# EAGLE board CT_schematic (EAGLE 7.6.0)

Size 100 x 80 mm. Coordinates in mm from the lower left corner, seen from the top.
Outline: 0,0 100,0 100,80 0,80 0,0
Copper layers (1*16): Top 0.035mm / dielectric 1.5mm / Bottom 0.035mm
Design rules "default": minimum track width 10mil, minimum drill 24mil, track to track 8mil, track to pad 8mil, pad to pad 8mil, via to via 8mil, smd to smd 8mil, copper to edge 40mil, drill to drill 8mil, minimum pad ring 10mil, minimum via ring 8mil, stop-mask expansion 4mil, vias tented up to drill 0mil, thermal gap 10mil

## Footprints (pad centres in the part's own frame; a part is rotated, then mirrored left to right if it is on the bottom)
C0603 = smd 0.8 x 0.8: 1 -0.762,0; 2 0.762,0
C0402 = smd 0.5 x 0.5: 1 -0.508,0; 2 0.508,0
C0805 = smd 1.2 x 1.3: 1 -1.016,0; 2 1.016,0
R0603 = smd 0.8 x 0.8: 1 -0.762,0; 2 0.762,0
C1210 = smd 1.2 x 2.5: 1 -1.524,0; 2 1.524,0
C1206 = smd 1.3 x 1.6: 1 -1.524,0; 2 1.524,0
EXV-9H = smd 3.505 x 1.676: 1 -2.857,0; 2 2.857,0
L0603 = smd 0.8 x 0.8: 1 -0.762,0; 2 0.762,0
PJ-037B_PACKAGE = drill 3.7 square: 1 12,0 | drill 3.2 square: 2 6,0
UFBGA176_25 = smd 0.3 x 0.3: A1 -4.55,4.55; A2 -3.9,4.55; A3 -3.25,4.55; A4 -2.6,4.55; A5 -1.95,4.55; A6 -1.3,4.55; A7 -0.65,4.55; A8 0,4.55; A9 0.65,4.55; A10 1.3,4.55; A11 1.95,4.55; A12 2.6,4.55; A13 3.25,4.55; A14 3.9,4.55; A15 4.55,4.55; B1 -4.55,3.9; B2 -3.9,3.9; B3 -3.25,3.9; B4 -2.6,3.9; B5 -1.95,3.9; B6 -1.3,3.9; B7 -0.65,3.9; B8 0,3.9; B9 0.65,3.9; B10 1.3,3.9; B11 1.95,3.9; B12 2.6,3.9; B13 3.25,3.9; B14 3.9,3.9; B15 4.55,3.9; C1 -4.55,3.25; C2 -3.9,3.25; C3 -3.25,3.25; C4 -2.6,3.25; C5 -1.95,3.25; C6 -1.3,3.25; C7 -0.65,3.25; C8 0,3.25; C9 0.65,3.25; C10 1.3,3.25; C11 1.95,3.25; C12 2.6,3.25; C13 3.25,3.25; C14 3.9,3.25; C15 4.55,3.25; D1 -4.55,2.6; D2 -3.9,2.6; D3 -3.25,2.6; D4 -2.6,2.6; D5 -1.95,2.6; D6 -1.3,2.6; D7 -0.65,2.6; D8 0,2.6; D9 0.65,2.6; D10 1.3,2.6; D11 1.95,2.6; D12 2.6,2.6; D13 3.25,2.6; D14 3.9,2.6; D15 4.55,2.6; E1 -4.55,1.95; E2 -3.9,1.95; E3 -3.25,1.95; E4 -2.6,1.95; E12 2.6,1.95; E13 3.25,1.95; E14 3.9,1.95; E15 4.55,1.95; F1 -4.55,1.3; F2 -3.9,1.3; F3 -3.25,1.3; F4 -2.6,1.3; F6 -1.3,1.3; F7 -0.65,1.3; F8 0,1.3; F9 0.65,1.3; F10 1.3,1.3; F12 2.6,1.3; F13 3.25,1.3; F14 3.9,1.3; F15 4.55,1.3; G1 -4.55,0.65; G2 -3.9,0.65; G3 -3.25,0.65; G4 -2.6,0.65; G6 -1.3,0.65; G7 -0.65,0.65; G8 0,0.65; G9 0.65,0.65; G10 1.3,0.65; G12 2.6,0.65; G13 3.25,0.65; G14 3.9,0.65; G15 4.55,0.65; H1 -4.55,0; H2 -3.9,0; H3 -3.25,0; H4 -2.6,0; H6 -1.3,0; H7 -0.65,0; H8 0,0; H9 0.65,0; H10 1.3,0; H12 2.6,0; H13 3.25,0; H14 3.9,0; H15 4.55,0; J1 -4.55,-0.65; J2 -3.9,-0.65; J3 -3.25,-0.65; J4 -2.6,-0.65; J6 -1.3,-0.65; J7 -0.65,-0.65; J8 0,-0.65; J9 0.65,-0.65; J10 1.3,-0.65; J12 2.6,-0.65; J13 3.25,-0.65; J14 3.9,-0.65; J15 4.55,-0.65; K1 -4.55,-1.3; K2 -3.9,-1.3; K3 -3.25,-1.3; K4 -2.6,-1.3; K6 -1.3,-1.3; K7 -0.65,-1.3; K8 0,-1.3; K9 0.65,-1.3; K10 1.3,-1.3; K12 2.6,-1.3; K13 3.25,-1.3; K14 3.9,-1.3; K15 4.55,-1.3; L1 -4.55,-1.95; L2 -3.9,-1.95; L3 -3.25,-1.95; L4 -2.6,-1.95; L12 2.6,-1.95; L13 3.25,-1.95; L14 3.9,-1.95; L15 4.55,-1.95; M1 -4.55,-2.6; M2 -3.9,-2.6; M3 -3.25,-2.6; M4 -2.6,-2.6; M5 -1.95,-2.6; M6 -1.3,-2.6; M7 -0.65,-2.6; M8 0,-2.6; M9 0.65,-2.6; M10 1.3,-2.6; M11 1.95,-2.6; M12 2.6,-2.6; M13 3.25,-2.6; M14 3.9,-2.6; M15 4.55,-2.6; N1 -4.55,-3.25; N2 -3.9,-3.25; N3 -3.25,-3.25; N4 -2.6,-3.25; N5 -1.95,-3.25; N6 -1.3,-3.25; N7 -0.65,-3.25; N8 0,-3.25; N9 0.65,-3.25; N10 1.3,-3.25; N11 1.95,-3.25; N12 2.6,-3.25; N13 3.25,-3.25; N14 3.9,-3.25; N15 4.55,-3.25; P1 -4.55,-3.9; P2 -3.9,-3.9; P3 -3.25,-3.9; P4 -2.6,-3.9; P5 -1.95,-3.9; P6 -1.3,-3.9; P7 -0.65,-3.9; P8 0,-3.9; P9 0.65,-3.9; P10 1.3,-3.9; P11 1.95,-3.9; P12 2.6,-3.9; P13 3.25,-3.9; P14 3.9,-3.9; P15 4.55,-3.9; R1 -4.55,-4.55; R2 -3.9,-4.55; R3 -3.25,-4.55; R4 -2.6,-4.55; R5 -1.95,-4.55; R6 -1.3,-4.55; R7 -0.65,-4.55; R8 0,-4.55; R9 0.65,-4.55; R10 1.3,-4.55; R11 1.95,-4.55; R12 2.6,-4.55; R13 3.25,-4.55; R14 3.9,-4.55; R15 4.55,-4.55
IS61WV102416BLL-10MLI = smd 0.4 x 0.4: A1 0,0; A2 0.75,0; A3 1.5,0; A4 2.25,0; A5 3,0; A6 3.75,0; B1 0,-0.75; B2 0.75,-0.75; B3 1.5,-0.75; B4 2.25,-0.75; B5 3,-0.75; B6 3.75,-0.75; C1 0,-1.5; C2 0.75,-1.5; C3 1.5,-1.5; C4 2.25,-1.5; C5 3,-1.5; C6 3.75,-1.5; D1 0,-2.25; D2 0.75,-2.25; D3 1.5,-2.25; D4 2.25,-2.25; D5 3,-2.25; D6 3.75,-2.25; E1 0,-3; E2 0.75,-3; E3 1.5,-3; E4 2.25,-3; E5 3,-3; E6 3.75,-3; F1 0,-3.75; F2 0.75,-3.75; F3 1.5,-3.75; F4 2.25,-3.75; F5 3,-3.75; F6 3.75,-3.75; G1 0,-4.5; G2 0.75,-4.5; G3 1.5,-4.5; G4 2.25,-4.5; G5 3,-4.5; G6 3.75,-4.5; H1 0,-5.25; H2 0.75,-5.25; H3 1.5,-5.25; H4 2.25,-5.25; H5 3,-5.25; H6 3.75,-5.25
MOLEX_47219-2001 = smd 0.8 x 1.5: 1 3.2,-2.1; 2 2.1,-2.1; 3 1,-2.1; 4 -0.1,-2.1; 5 -1.2,-2.1; 6 -2.3,-2.1; 7 -3.4,-2.1; 8 -4.5,-2.1 | smd 1.5 x 2.05: G1 6.875,-4.7; G2 6.875,3.6; G3 -6.875,3.6; G4 -6.875,-4.7
RHB32_3P45X3P45 = smd 0.85 x 0.28: 1 -2.475,1.75; 2 -2.475,1.25; 3 -2.475,0.75; 4 -2.475,0.25; 5 -2.475,-0.25; 6 -2.475,-0.75; 7 -2.475,-1.25; 8 -2.475,-1.75; 17 2.475,-1.75; 18 2.475,-1.25; 19 2.475,-0.75; 20 2.475,-0.25; 21 2.475,0.25; 22 2.475,0.75; 23 2.475,1.25; 24 2.475,1.75 | smd 0.28 x 0.85: 9 -1.75,-2.475; 10 -1.25,-2.475; 11 -0.75,-2.475; 12 -0.25,-2.475; 13 0.25,-2.475; 14 0.75,-2.475; 15 1.25,-2.475; 16 1.75,-2.475; 25 1.75,2.475; 26 1.25,2.475; 27 0.75,2.475; 28 0.25,2.475; 29 -0.25,2.475; 30 -0.75,2.475; 31 -1.25,2.475; 32 -1.75,2.475 | smd 3.45 x 3.45: 33 0,0
USB-A-H = drill 0.914: 1 2.718,3.493; 2 2.718,1.003; 3 2.718,-1.003; 4 2.718,-3.493 | drill 2.311: 5 0,-6.566; 6 0,6.566
SOT143B = smd 1 x 0.7: 1 -0.75,-1 | smd 0.6 x 0.7: 2 0.95,-1; 3 0.95,1; 4 -0.95,1
SOT-23-6 = smd 1.1 x 0.6: 1 -1.4,0.95; 2 -1.4,0; 3 -1.4,-0.95; 4 1.4,-0.95; 5 1.4,0; 6 1.4,0.95
FCI_10118193-0001LF = smd 0.4 x 1.35: 1 -1.3,2.675; 2 -0.65,2.675; 3 0,2.675; 4 0.65,2.675; 5 1.3,2.675 | smd 1.6 x 1.4: 6 -3.2,2.45; 7 3.2,2.45 | smd 1.9 x 1.9: 8 -1.2,0; 9 1.2,0 | hole 0.5: -3.3,0; 3.3,0
QFN-28 = smd 0.813 x 0.305: 1 -2.451,1.5; 2 -2.451,1; 3 -2.451,0.5; 4 -2.451,0; 5 -2.451,-0.5; 6 -2.451,-1; 7 -2.451,-1.5; 15 2.451,-1.5; 16 2.451,-1; 17 2.451,-0.5; 18 2.451,0; 19 2.451,0.5; 20 2.451,1; 21 2.451,1.5 | smd 0.305 x 0.813: 8 -1.5,-2.451; 9 -1,-2.451; 10 -0.5,-2.451; 11 0,-2.451; 12 0.5,-2.451; 13 1,-2.451; 14 1.5,-2.451; 22 1.5,2.451; 23 1,2.451; 24 0.5,2.451; 25 0,2.451; 26 -0.5,2.451; 27 -1,2.451; 28 -1.5,2.451 | smd 3.607 x 3.607: 29 0,0
SJ-43515TS-SMT-TR = smd 2.2 x 3: 1 0.6,-7.4; 4 3.4,-7.4 | smd 3 x 3: 2 12.8,-7.4; 5 17,-3 | smd 2 x 3: 3 5.3,0; 6 2.5,0 | drill 1.8: P$7 4.5,-3.69; P$8 11.54,-3.69
ABS07-32.768KHZ-7-T = smd 1.1 x 2.4: 1 -2.5,0; 2 0,0
ABLS-12.288MHZ-B4-T = smd 5.6 x 2.8: 1 -3.81,0; 2 5.69,0
ASFL1 = smd 1.7 x 1.5: 1 -1.27,-1.1; 2 1.27,-1.1; 3 1.27,1.1; 4 -1.27,1.1
WSON-8 = smd 0.3 x 0.6: 1 -0.75,0; 2 0.05,0; 3 0.85,0; 4 1.65,0; 5 1.65,3.8; 6 0.85,3.8; 7 0.05,3.8; 8 -0.75,3.8 | smd 3 x 2.6: PAD 0.45,1.9
SON-6 = smd 0.55 x 0.3: 1 -0.355,0.5 | smd 0.52 x 0.3: 2 -0.37,0; 3 -0.37,-0.5; 4 0.37,-0.5; 5 0.37,0; 6 0.37,0.5
SW_4-1437565-2 = smd 1.4 x 2.1: 1 -2.23,4.55; 2 -2.23,-4.55; 3 2.23,4.55; 4 2.23,-4.55
LGM67K-G1J2-24-Z = smd 0.8 x 1.4: A -2,0; C 0,0
NC7SZ125M5X = smd 1.3 x 0.7: 1 -1.3,0.95; 2 -1.3,0; 3 -1.3,-0.95; 4 1.3,-0.95; 5 1.3,0.95

## Placement (x,y rotation side)
C1  1e-08  [C0603]  -41.91,81.28 0 top  (outside the outline)
C2  1e-06  [C0603]  -45.72,81.28 0 top  (outside the outline)
C3  2.2e-06  [C0603]  -19.05,81.28 0 top  (outside the outline)
C4  2.2e-06  [C0603]  -22.86,81.28 0 top  (outside the outline)
C5  1e-11  [C0402]  -85.09,86.36 0 top  (outside the outline)
C6  1e-11  [C0402]  -88.9,86.36 0 top  (outside the outline)
C7  1e-06  [C0603]  -49.53,81.28 0 top  (outside the outline)
C8  1e-07  [C0603]  -53.34,81.28 0 top  (outside the outline)
C9  1e-07  [C0603]  -57.15,81.28 0 top  (outside the outline)
C10  1e-07  [C0603]  -60.96,81.28 0 top  (outside the outline)
C11  1e-07  [C0603]  -64.77,81.28 0 top  (outside the outline)
C12  1e-07  [C0603]  -68.58,81.28 0 top  (outside the outline)
C13  1e-07  [C0603]  -72.39,81.28 0 top  (outside the outline)
C14  1e-07  [C0603]  -76.2,81.28 0 top  (outside the outline)
C15  1e-07  [C0603]  -80.01,81.28 0 top  (outside the outline)
C16  1e-07  [C0603]  -83.82,81.28 0 top  (outside the outline)
C17  1e-07  [C0603]  -87.63,81.28 0 top  (outside the outline)
C18  1e-07  [C0603]  -15.24,86.36 0 top  (outside the outline)
C19  1e-07  [C0603]  -19.05,86.36 0 top  (outside the outline)
C20  1e-07  [C0603]  -22.86,86.36 0 top  (outside the outline)
C21  1e-07  [C0603]  -26.67,86.36 0 top  (outside the outline)
C22  1e-07  [C0603]  -30.48,86.36 0 top  (outside the outline)
C23  4.7e-06  [C0603]  -26.67,81.28 0 top  (outside the outline)
C25  1e-07  [C0402]  -15.24,91.44 0 top  (outside the outline)
C26  2.2e-06  [C0603]  -30.48,81.28 0 top  (outside the outline)
C27  1e-07  [C0402]  -19.05,91.44 0 top  (outside the outline)
C28  1e-05  [C0805]  -78.74,63.5 0 top  (outside the outline)
C29  1e-07  [C0402]  -22.86,91.44 0 top  (outside the outline)
C30  2.2e-06  [C0603]  -34.29,81.28 0 top  (outside the outline)
C31  1e-07  [C0402]  -26.67,91.44 0 top  (outside the outline)
C32  1e-07  [C0402]  -30.48,91.44 0 top  (outside the outline)
C33  2.2e-06  [C0603]  -38.1,81.28 0 top  (outside the outline)
C34  0.0001  [R0603]  -34.29,86.36 0 top  (outside the outline)
C35  2.2e-05  [C1210]  -24.13,64.77 0 top  (outside the outline)
C36  2.2e-05  [C1210]  -30.48,64.77 0 top  (outside the outline)
C37  1e-09  [C0402]  -34.29,91.44 0 top  (outside the outline)
C38  1e-09  [C0402]  -38.1,91.44 0 top  (outside the outline)
C39  1e-07  [C0402]  -41.91,91.44 0 top  (outside the outline)
C40  1e-07  [C0402]  -45.72,91.44 0 top  (outside the outline)
C41  1e-07  [C0402]  -49.53,91.44 0 top  (outside the outline)
C42  1e-07  [C0402]  -53.34,91.44 0 top  (outside the outline)
C43  1e-07  [C0402]  -57.15,91.44 0 top  (outside the outline)
C44  1e-05  [C0805]  -83.82,63.5 0 top  (outside the outline)
C45  1e-05  [C0805]  -88.9,63.5 0 top  (outside the outline)
C46  1e-05  [C0805]  -15.24,71.12 0 top  (outside the outline)
C47  1e-05  [C0805]  -20.32,71.12 0 top  (outside the outline)
C48  1e-05  [C0805]  -25.4,71.12 0 top  (outside the outline)
C49  2.2e-11  [C0402]  -77.47,86.36 0 top  (outside the outline)
C50  2.2e-11  [C0402]  -81.28,86.36 0 top  (outside the outline)
C51  1e-08  [C0402]  -60.96,91.44 0 top  (outside the outline)
C52  1e-08  [C0402]  -64.77,91.44 0 top  (outside the outline)
C53  1e-08  [C0402]  -68.58,91.44 0 top  (outside the outline)
C54  1e-05  [C1206]  -49.53,63.5 0 top  (outside the outline)
C55  1e-05  [C0805]  -30.48,71.12 0 top  (outside the outline)
C56  1e-06  [C0603]  -38.1,86.36 0 top  (outside the outline)
C57  1e-05  [C1210]  -36.83,64.77 0 top  (outside the outline)
C58  1e-08  [C0402]  -72.39,91.44 0 top  (outside the outline)
C59  1e-05  [C1206]  -55.88,63.5 0 top  (outside the outline)
C60  1e-05  [C1210]  -43.18,64.77 0 top  (outside the outline)
C61  1e-07  [C0402]  -76.2,91.44 0 top  (outside the outline)
C62  0.0001  [EXV-9H]  -82.55,48.26 0 top  (outside the outline)
C63  0.0001  [EXV-9H]  -17.78,57.15 0 top  (outside the outline)
C64  1e-08  [C0402]  -80.01,91.44 0 top  (outside the outline)
C65  1e-08  [C0402]  -83.82,91.44 0 top  (outside the outline)
F1  240.0  [L0603]  -41.91,86.36 0 top  (outside the outline)
J1  PJ-037B  [PJ-037B_PACKAGE]  -83.82,24.13 0 top  (outside the outline)
R2  1000.0  [R0603]  -45.72,86.36 0 top  (outside the outline)
R4  4700.0  [R0603]  -49.53,86.36 0 top  (outside the outline)
R5  4700.0  [R0603]  -53.34,86.36 0 top  (outside the outline)
R6  10000.0  [R0603]  -25.4,76.2 0 top  (outside the outline)
R7  10000.0  [R0603]  -30.48,76.2 0 top  (outside the outline)
R8  10000.0  [R0603]  -35.56,76.2 0 top  (outside the outline)
R9  10000.0  [R0603]  -40.64,76.2 0 top  (outside the outline)
R10  10000.0  [R0603]  -45.72,76.2 0 top  (outside the outline)
R11  100000.0  [R0603]  -40.64,69.85 0 top  (outside the outline)
R12  100000.0  [R0603]  -45.72,69.85 0 top  (outside the outline)
R13  100000.0  [R0603]  -50.8,69.85 0 top  (outside the outline)
R14  100000.0  [R0603]  -55.88,69.85 0 top  (outside the outline)
R15  100000.0  [R0603]  -60.96,69.85 0 top  (outside the outline)
R16  100000.0  [R0603]  -66.04,69.85 0 top  (outside the outline)
R17  47000.0  [R0603]  -50.8,76.2 0 top  (outside the outline)
R18  10000.0  [R0603]  -55.88,76.2 0 top  (outside the outline)
R19  10000.0  [R0603]  -60.96,76.2 0 top  (outside the outline)
R20  47000.0  [R0603]  -66.04,76.2 0 top  (outside the outline)
R21  47000.0  [R0603]  -71.12,76.2 0 top  (outside the outline)
R22  47000.0  [R0603]  -76.2,76.2 0 top  (outside the outline)
R23  680.0  [R0603]  -57.15,86.36 0 top  (outside the outline)
R24  100000.0  [R0603]  -71.12,69.85 0 top  (outside the outline)
R25  806.0  [R0603]  -60.96,86.36 0 top  (outside the outline)
R26  1000.0  [R0603]  -64.77,86.36 0 top  (outside the outline)
R27  100000.0  [R0603]  -76.2,69.85 0 top  (outside the outline)
R28  153694.38  [R0603]  -35.56,69.85 0 top  (outside the outline)
R29  100000.0  [R0603]  -81.28,69.85 0 top  (outside the outline)
R30  100000.0  [R0603]  -86.36,69.85 0 top  (outside the outline)
R31  3900.0  [R0603]  -68.58,86.36 0 top  (outside the outline)
R32  1000.0  [R0603]  -72.39,86.36 0 top  (outside the outline)
R33  10000.0  [R0603]  -81.28,76.2 0 top  (outside the outline)
R34  10000.0  [R0603]  -86.36,76.2 0 top  (outside the outline)
R35  82000.0  [R0603]  -15.24,81.28 0 top  (outside the outline)
R36  300000.0  [R0603]  -15.24,76.2 0 top  (outside the outline)
R37  120000.0  [R0603]  -20.32,76.2 0 top  (outside the outline)
U1  STM32f207IGH6  [UFBGA176_25]  -55.88,6.35 0 top  (outside the outline)
U2  IS61WV102416BLL-10MLI  [IS61WV102416BLL-10MLI]  -39.37,40.64 0 top  (outside the outline)
U3  0472192001  [MOLEX_47219-2001]  -39.37,8.89 0 top  (outside the outline)
U4  TUSB1210BRHBR  [RHB32_3P45X3P45]  -46.99,57.15 0 top  (outside the outline)
U5  61400416021  [USB-A-H]  -19.05,8.89 0 top  (outside the outline)
U6  prtr5v0u2ax  [SOT143B]  -24.13,96.52 0 top  (outside the outline)
U7  MAX4995AAUT+T  [SOT-23-6]  -60.96,63.5 0 top  (outside the outline)
U8  10118193-0001LF  [FCI_10118193-0001LF]  -72.39,48.26 0 top  (outside the outline)
U9  prtr5v0u2ax  [SOT143B]  -36.83,96.52 0 top  (outside the outline)
U10  WM8731CLSEFL  [QFN-28]  -16.51,64.77 0 top  (outside the outline)
U11  SJ-43515TS-SMT-TR  [SJ-43515TS-SMT-TR]  -39.37,26.67 0 top  (outside the outline)
U12  SJ-43515TS-SMT-TR  [SJ-43515TS-SMT-TR]  -67.31,26.67 0 top  (outside the outline)
U13  ABS07-32.768KHZ-7-T  [ABS07-32.768KHZ-7-T]  -67.31,57.15 0 top  (outside the outline)
U14  ABLS-12.288MHZ-B4-T  [ABLS-12.288MHZ-B4-T]  -35.56,57.15 0 top  (outside the outline)
U15  ASFL1-19.2MHZ-NCS  [ASFL1]  -46.99,48.26 0 top  (outside the outline)
U16  ASFL1-25MHZ-NCS  [ASFL1]  -63.5,48.26 0 top  (outside the outline)
U17  LP3878SDX-ADJ/NOPB  [WSON-8]  -59.69,34.29 0 top  (outside the outline)
U18  LP2951ACSDX/NOPB  [WSON-8]  -29.21,46.99 0 top  (outside the outline)
U19  LP3878SDX-ADJ/NOPB  [WSON-8]  -80.01,34.29 0 top  (outside the outline)
U20  TPS3895ADRYR  [SON-6]  -40.64,95.25 0 top  (outside the outline)
U21  4-1437565-2  [SW_4-1437565-2]  -27.94,38.1 0 top  (outside the outline)
U22  Q65110A2395  [LGM67K-G1J2-24-Z]  -76.2,57.15 0 top  (outside the outline)
U23  nc7sz125m5x  [NC7SZ125M5X]  -66.04,63.5 0 top  (outside the outline)
U24  nc7sz125m5x  [NC7SZ125M5X]  -72.39,63.5 0 top  (outside the outline)

## Library data of the parts
C1-C23 C25-C65 F1 J1 R2 R4-R37 U1-U24 = circuit_tree

## Nets
CLK_CRYSTAL_U1_E1: C5.1 U1.E1 U13.1
CLK_CRYSTAL_U1_F1: C6.1 U1.F1 U13.2
CLK_CRYSTAL_U10_1: C49.1 U10.1 U14.1
CLK_CRYSTAL_U10_2: C50.1 U10.2 U14.2
CLK_U1_G1: U1.G1 U16.3
CLK_U4_1: U4.1 U15.3
GND: C1.2 C2.2 C3.2 C4.2 C5.2 C6.2 C7.2 C8.2 C9.2 C10.2 C11.2 C12.2 C13.2 C14.2 C15.2 C16.2 C17.2 C18.2 C19.2 C20.2 C21.2 C22.2 C23.2 C25.2 C26.2 C27.2 C28.2 C29.2 C30.2 C31.2 C32.2 C33.2 C34.2 C38.2 C39.2 C40.2 C41.2 C42.2 C43.2 C44.2 C45.2 C46.2 C47.2 C48.2 C49.2 C50.2 C51.2 C52.2 C53.2 C54.2 C55.2 C56.2 C57.2 C58.2 C59.2 C60.2 C61.2 C62.2 C63.2 C64.2 C65.2 J1.2 R2.2 R6.2 R7.2 R17.2 R19.2 R20.2 R21.2 R22.2 R26.2 R29.2 R32.2 R35.2 R37.2 U1.D5 U1.D7 U1.D8 U1.D9 U1.F2 U1.F6 U1.F7 U1.F8 U1.F9 U1.F10 U1.F12 U1.G2 U1.G6 U1.G7 U1.G8 U1.G9 U1.G10 U1.G12 U1.H6 U1.H7 U1.H8 U1.H9 U1.H10 U1.H12 U1.J6 U1.J7 U1.J8 U1.J9 U1.J10 U1.K6 U1.K7 U1.K8 U1.K9 U1.K10 U1.M1 U1.M8 U1.M9 U1.N1 U2.D1 U2.E6 U3.6 U3.G1 U3.G2 U3.G3 U3.G4 U4.23 U4.33 U5.4 U5.5 U5.6 U6.1 U7.2 U8.5 U8.6 U8.7 U8.8 U8.9 U9.1 U10.4 U10.15 U10.19 U10.25 U10.26 U10.29 U11.1 U12.1 U15.2 U16.2 U17.3 U17.PAD U18.3 U18.4 U18.PAD U19.3 U19.PAD U20.2 U22.C U23.1 U23.3 U24.1 U24.3
NET_U1_C5: U1.C5
NET_U1_D6: R6.1 U1.D6
NET_U1_F13: C4.1 U1.F13
NET_U1_J1: R4.1 U1.J1 U23.4
NET_U1_L4: R7.1 U1.L4
NET_U1_M10: C3.1 U1.M10
NET_U1_R1: C1.1 C2.1 F1.1 U1.P1 U1.R1
NET_U1_R14: U22.A
NET_U1_R15: U21.3 U21.4
NET_U2_A2: R9.1 U2.A2
NET_U2_B5: R8.1 U2.B5
NET_U2_G5: R10.1 U2.G5
NET_U4_11: R18.1 U4.11
NET_U4_12: C33.1 U4.12
NET_U4_14: R19.1 U4.14
NET_U4_20: C30.1 U4.20
NET_U4_27: R5.1 U4.27 U24.4
NET_U5_1: C34.1 U4.22 U5.1 U6.4 U7.1
NET_U5_2: U4.19 U5.2 U6.3
NET_U5_3: U4.18 U5.3 U6.2
NET_U7_3: R17.1 U7.3
NET_U7_4: U4.17 U7.4
NET_U10_9: U10.9
NET_U10_20: C43.1 C48.1 U10.20
NET_U11_2: C36.1 R21.1 U11.2
NET_U11_5: C35.1 R20.1 U11.5
NET_U11_13: C35.2
NET_U11_14: C36.2
NET_U12_5: C37.1 C38.1 R22.1 R23.1 U12.5
NET_U12_21: R23.2
NET_U12_22: C37.2
NET_U17_1: C53.1 U17.1
NET_U17_6: R25.2 R26.1 U17.6
NET_U17_8: R24.1 U17.8
NET_U18_5: R27.1 U18.5
NET_U18_7: R28.2 R29.1 U18.7
NET_U19_1: C58.1 U19.1
NET_U19_6: R31.2 R32.1 U19.6
NET_U19_8: R30.1 U19.8
NET_U20_1: R34.1 R35.1 U20.1
NET_U20_3: R36.2 R37.1 U20.3
NET_U20_4: R33.1 U20.4 U23.2 U24.2
NET_U21_1: R2.1 U21.1 U21.2
PROC_I2S2_SCK: U1.D14 U10.7
PROC_I2S2_SD: U1.C13 U10.8
PROC_I2S2_WS: U1.B4 U10.9 U10.11
PROC_SDIO_CK: R12.1 U1.A12 U3.5
PROC_SDIO_CMD: R11.1 U1.D12 U3.3
PROC_SDIO_D0: R13.1 U1.G14 U3.7
PROC_SDIO_D1: R14.1 U1.F14 U3.8
PROC_SDIO_D2: R15.1 U1.B14 U3.1
PROC_SDIO_D3: R16.1 U1.B13 U3.2
PROC_USB_OTG_FS_DM: U8.2 U9.3
PROC_USB_OTG_FS_DP: U8.3 U9.2
PROC_USB_OTG_FS_VBUS: U8.1 U9.4
PROC_USB_OTG_HS_ULPI_CK: U1.P4 U4.26
PROC_USB_OTG_HS_ULPI_D0: U1.R2 U4.3
PROC_USB_OTG_HS_ULPI_D1: U1.R5 U4.4
PROC_USB_OTG_HS_ULPI_D2: U1.R4 U4.5
PROC_USB_OTG_HS_ULPI_D3: U1.R12 U4.6
PROC_USB_OTG_HS_ULPI_D4: U1.R13 U4.7
PROC_USB_OTG_HS_ULPI_D5: U1.P12 U4.9
PROC_USB_OTG_HS_ULPI_D6: U1.P13 U4.10
PROC_USB_OTG_HS_ULPI_D7: U1.A6 U4.13
PROC_USB_OTG_HS_ULPI_DIR: U1.E4 U4.31
PROC_USB_OTG_HS_ULPI_NXT: U1.H4 U4.2
PROC_USB_OTG_HS_ULPI_STP: U1.M2 U4.29
VCC_S1_8V6: C54.1 C56.1 C59.1 C62.1 C63.1 J1.1 R24.2 R30.2 U17.4 U18.8 U19.4
VCC_TIER1_1V8: C7.1 C8.1 C9.1 C10.1 C11.1 C12.1 C13.1 C14.1 C15.1 C16.1 C17.1 C18.1 C19.1 C20.1 C21.1 C22.1 C23.1 C27.1 C28.1 C31.1 C32.1 C39.1 C40.1 C41.1 C42.1 C44.1 C45.1 C46.1 C47.1 C55.1 C61.1 C64.1 C65.1 F1.2 R4.2 R5.2 R11.2 R12.2 R13.2 R14.2 R15.2 R16.2 R18.2 R25.1 R33.2 R34.2 R36.1 U1.C1 U1.C5 U1.C7 U1.C8 U1.C9 U1.F3 U1.G3 U1.G13 U1.H13 U1.J12 U1.J13 U1.K4 U1.N8 U1.N9 U1.N10 U3.4 U4.28 U4.30 U4.32 U10.3 U10.5 U10.12 U10.18 U17.5 U20.6 U23.5 U24.5
VCC_TIER1_3V3: C25.1 C26.1 C29.1 C51.1 C52.1 C57.1 R8.2 R9.2 R10.2 R27.2 R28.1 U2.D6 U2.E1 U4.21 U15.4 U16.4 U18.1
VCC_TIER1_5V0: C60.1 R31.1 U7.5 U19.5

## Tracks (layer width: path | path; a pad name or v marks a point on that pad's centre or on a via)
CLK_CRYSTAL_U1_E1  (2 unrouted)
CLK_CRYSTAL_U1_F1  (2 unrouted)
CLK_CRYSTAL_U10_1  (2 unrouted)
CLK_CRYSTAL_U10_2  (2 unrouted)
CLK_U1_G1  (1 unrouted)
CLK_U4_1  (1 unrouted)
GND  (155 unrouted)
NET_U1_D6  (1 unrouted)
NET_U1_F13  (1 unrouted)
NET_U1_J1  (2 unrouted)
NET_U1_L4  (1 unrouted)
NET_U1_M10  (1 unrouted)
NET_U1_R1  (4 unrouted)
NET_U1_R15  (1 unrouted)
NET_U2_A2  (1 unrouted)
NET_U2_B5  (1 unrouted)
NET_U2_G5  (1 unrouted)
NET_U4_11  (1 unrouted)
NET_U4_12  (1 unrouted)
NET_U4_14  (1 unrouted)
NET_U4_20  (1 unrouted)
NET_U4_27  (2 unrouted)
NET_U5_1  (4 unrouted)
NET_U5_2  (2 unrouted)
NET_U5_3  (2 unrouted)
NET_U7_3  (1 unrouted)
NET_U7_4  (1 unrouted)
NET_U10_20  (2 unrouted)
NET_U11_2  (2 unrouted)
NET_U11_5  (2 unrouted)
NET_U12_5  (4 unrouted)
NET_U17_1  (1 unrouted)
NET_U17_6  (2 unrouted)
NET_U17_8  (1 unrouted)
NET_U18_5  (1 unrouted)
NET_U18_7  (2 unrouted)
NET_U19_1  (1 unrouted)
NET_U19_6  (2 unrouted)
NET_U19_8  (1 unrouted)
NET_U20_1  (2 unrouted)
NET_U20_3  (2 unrouted)
NET_U20_4  (3 unrouted)
NET_U21_1  (2 unrouted)
PROC_I2S2_SCK  (1 unrouted)
PROC_I2S2_SD  (1 unrouted)
PROC_I2S2_WS  (2 unrouted)
PROC_SDIO_CK  (2 unrouted)
PROC_SDIO_CMD  (2 unrouted)
PROC_SDIO_D0  (2 unrouted)
PROC_SDIO_D1  (2 unrouted)
PROC_SDIO_D2  (2 unrouted)
PROC_SDIO_D3  (2 unrouted)
PROC_USB_OTG_FS_DM  (1 unrouted)
PROC_USB_OTG_FS_DP  (1 unrouted)
PROC_USB_OTG_FS_VBUS  (1 unrouted)
PROC_USB_OTG_HS_ULPI_CK  (1 unrouted)
PROC_USB_OTG_HS_ULPI_D0  (1 unrouted)
PROC_USB_OTG_HS_ULPI_D1  (1 unrouted)
PROC_USB_OTG_HS_ULPI_D2  (1 unrouted)
PROC_USB_OTG_HS_ULPI_D3  (1 unrouted)
PROC_USB_OTG_HS_ULPI_D4  (1 unrouted)
PROC_USB_OTG_HS_ULPI_D5  (1 unrouted)
PROC_USB_OTG_HS_ULPI_D6  (1 unrouted)
PROC_USB_OTG_HS_ULPI_D7  (1 unrouted)
PROC_USB_OTG_HS_ULPI_DIR  (1 unrouted)
PROC_USB_OTG_HS_ULPI_NXT  (1 unrouted)
PROC_USB_OTG_HS_ULPI_STP  (1 unrouted)
VCC_S1_8V6  (10 unrouted)
VCC_TIER1_1V8  (73 unrouted)
VCC_TIER1_3V3  (16 unrouted)
VCC_TIER1_5V0  (3 unrouted)